# Altium PCB PCB KONACNO.PcbDoc (part 3 of 3)
Units mil, origin at the board's own origin, x right, y up, seen from the top; angles counter-clockwise.
Board outline 9378.94 x 3727.36 mil, 6 copper layers (Top Layer, Signal Layer 1, Signal Layer 2, Signal Layer 3, Signal Layer 4, Bottom Layer), stack 58.8 mil thick; 270 components, 238 nets, 1180 pads, 202 vias.
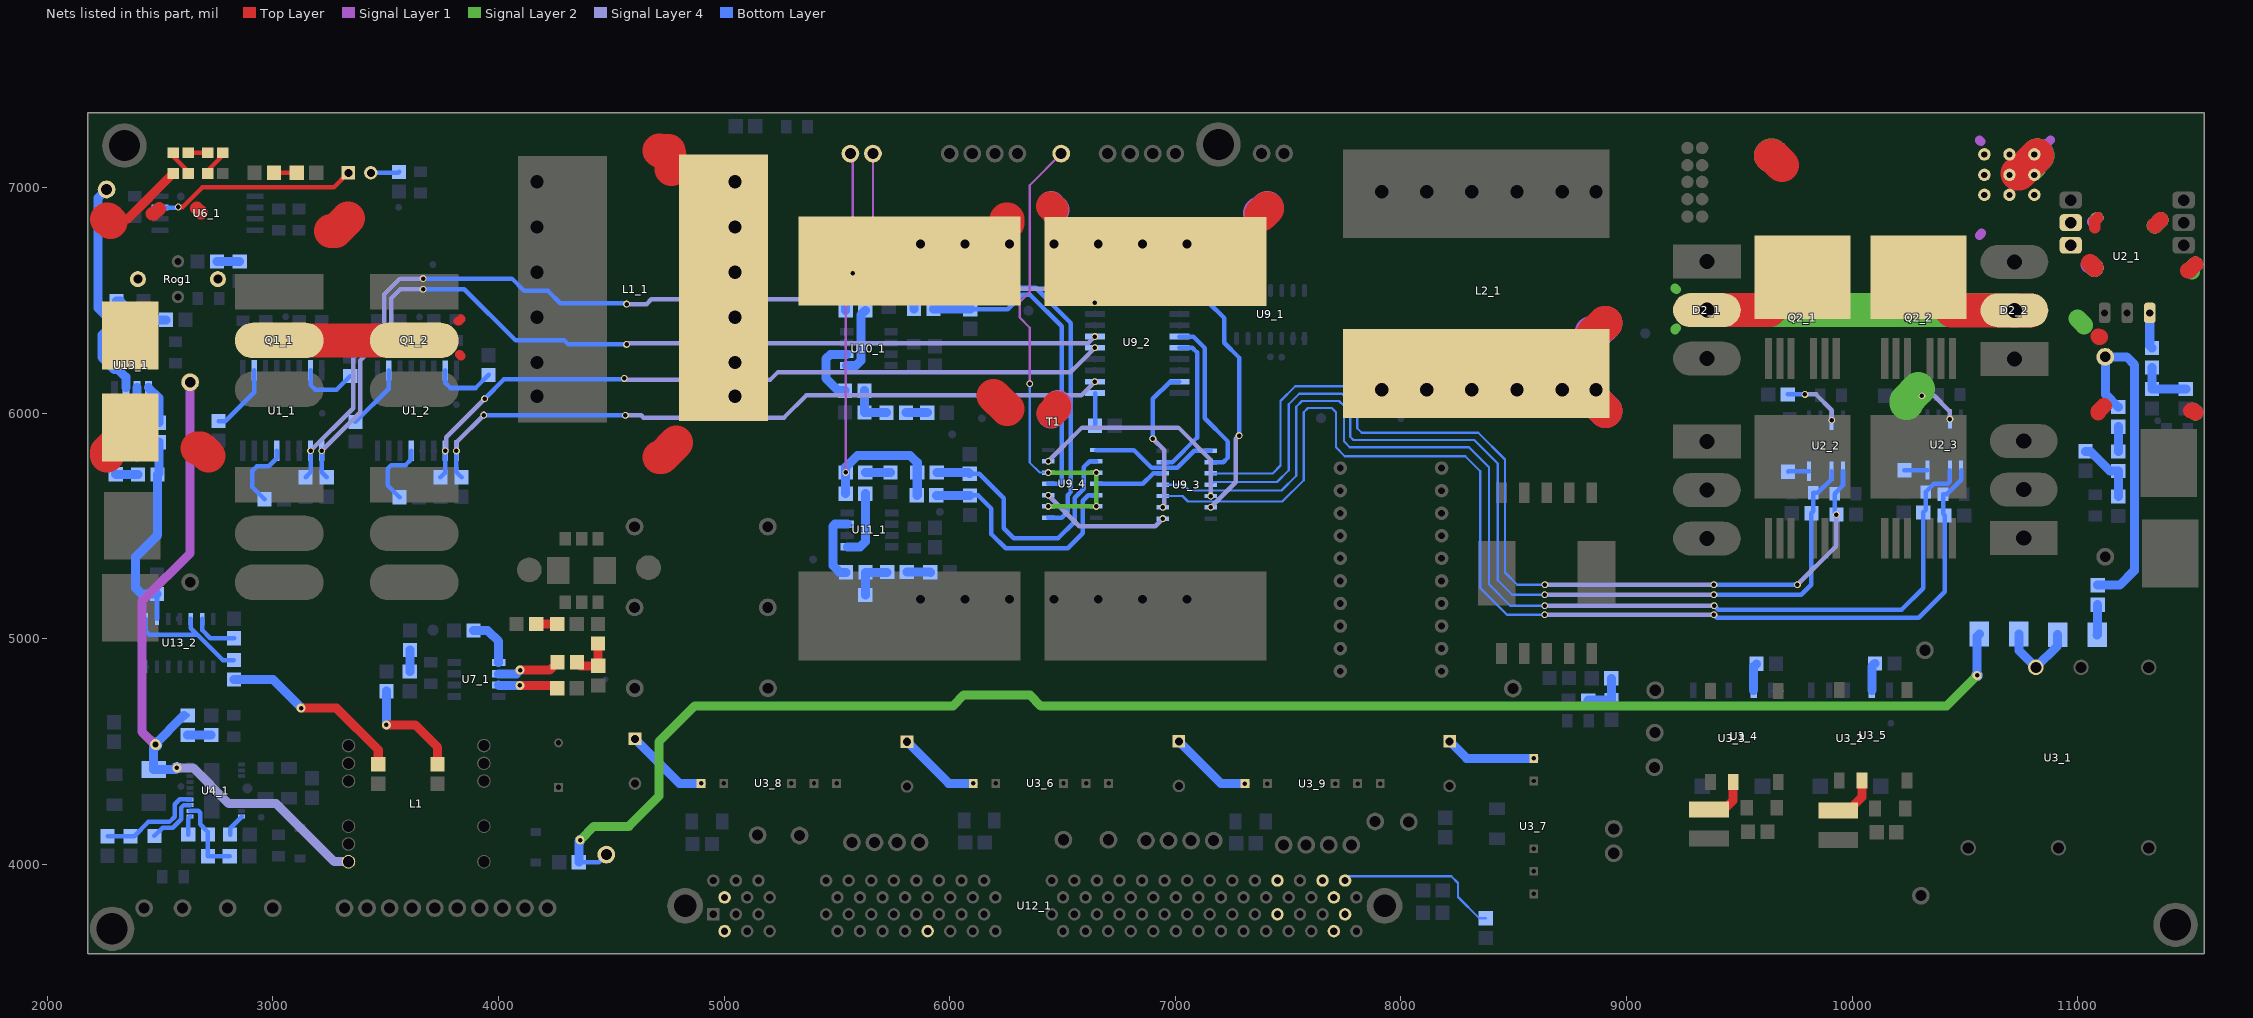
[diagram p7: the nets of this part, all layers, seen from the top]

## Via types
v1: diameter 30, hole 20, Signal Layer 4 to Bottom Layer, 76 vias
v2: diameter 30, hole 20, Top Layer to Bottom Layer, 35 vias
v3: diameter 30, hole 20, Signal Layer 2 to Bottom Layer, 18 vias
v4: diameter 30, hole 20, Signal Layer 1 to Signal Layer 2, 12 vias
v5: diameter 50, hole 28, Top Layer to Bottom Layer, 12 vias
v6: diameter 50, hole 28, Top Layer to Signal Layer 1, 10 vias
v7: diameter 50, hole 28, Top Layer to Signal Layer 2, 9 vias
v8: diameter 40, hole 20, Signal Layer 4 to Bottom Layer, 5 vias
v9: diameter 40, hole 20, Top Layer to Bottom Layer, 5 vias
v10: diameter 30, hole 20, Signal Layer 1 to Bottom Layer, 5 vias
v11: diameter 100, hole 50, Top Layer to Signal Layer 1, 4 vias
v12: diameter 40, hole 20, Signal Layer 2 to Bottom Layer, 3 vias
v13: diameter 40, hole 20, Top Layer to Signal Layer 4, 2 vias
v14: diameter 100, hole 50, Top Layer to Signal Layer 2, 2 vias
v15: diameter 30, hole 20, Signal Layer 3 to Bottom Layer, 1 vias
v16: diameter 120, hole 60, Top Layer to Signal Layer 2, 1 vias
v17: diameter 120, hole 60, Top Layer to Signal Layer 1, 1 vias
v18: diameter 50, hole 28, Signal Layer 1 to Bottom Layer, 1 vias

## Nets (pads, with @x,y where several pads share a name; then routed paths per layer and width w, separated by ;. In a path a pad name is that pad's centre, name@x,y a point inside that pad or via, vN(x,y) a via of type N, cw(c..) or ccw(c..) an arc to the next point about the centre after c; other vN are vias at no path point) (continued)
NetJ25_1: J25.1 pad.6@5570.87,6619.09 R10_7.1 R10_8.2 RP10_1.1 RP10_2.1 | length 1123.2
  Signal Layer 1 w10: J25.1@5560,7150 5570.87,7139.13 v10(5570.87,6619.09)
  Bottom Layer w40: R10_7.1@5539.37,6454.72 R10_8.2@5539.37,6557.09 5539.37,6587.6 v10(5570.87,6619.09) 5807.09,6619.09 5844.49,6581.69 RP10_1.1@5844.49,6555.12 5841.54,6552.17 RP10_2.1@5841.54,6461.61
NetJ26_1: J26.1 pad.6@5539.37,5737.2 R11_7.1 R11_8.2 RP11_1.1 RP11_2.1 | length 2077.5
  Signal Layer 1 w10: v10(5539.37,5737.2) 5539.37,6484.25 5660,6604.88 J26.1@5660,7150
  Bottom Layer w40: R11_7.1@5539.37,5642.72 v10(5539.37,5737.2) 5539.37,5760.83 5590.55,5812.01 5824.8,5812.01 5856.3,5780.51 RP11_1.1@5856.3,5736.22 5856.3,5637.8 RP11_2.1@5854.33,5635.83
NetJ31_1: J31.1 R13_2.2 U13_1.3 | length 1022.2
  Bottom Layer w40: J31.1@2263.78,6991.14 2225.39,6952.76 2225.39,6466.54 2282.48,6409.45 R13_2.2@2307.09,6409.45 2243.11,6345.47 2243.11,6248.03 2298.23,6192.91 2314.96,6192.91 2348.82,6159.06 U13_1.3@2348.82,6113.19
NetL1_1_2: L1_1.2 pad.4@4997.05,6555.12 pad.4@5822.83,6674.21 T1.1 | length 418.9
  Top Layer w150: 4713.58,5804.13 4723.43,5804.13 4788.39,5869.09 ; 4714.57,7163.39 4754.92,7161.42 4767.72,7081.69 ; pad.4@6190.94,6777.56 6255.91,6842.52 6255.91,6857.28 pad.4@6251.97,6857.28 ; 6194.88,6076.77 6253.94,6017.72 6255.91,6017.72
NetL2_1_1: L2_1.1 pad.4@6911.42,6671.26 pad.4@8332.68,6175.2 T1.3 | length 593.6
  Top Layer w130: 6446.85,6917.32 6460.63,6903.54 ; 6449.8,5999.02 6473.43,6022.64 6473.43,6032.48
  Top Layer w150: 7380.91,6879.92 7380.91,6880.91 7407.48,6907.48 ; pad.4@8795.28,6120.08 8906.5,6008.86 pad.4@8906.5,6007.87 ; pad.4@8851.38,6349.41 8901.57,6399.61 8907.48,6399.61
  Signal Layer 1 w130: 6448.82,6919.29 6448.82,6917.32 6465.55,6900.59 ; 6449.8,5997.05 6480.31,6027.56 6480.31,6036.42
  Signal Layer 1 w150: 7375,6885.83 7384.84,6885.83 7407.48,6908.46 ; 8843.5,6356.3 8864.17,6356.3 8907.48,6399.61 ; 8867.13,6048.23 8906.5,6008.86
NetL3_4_1: L3_4.1 U3_4.2 | length 206.5
  Top Layer w40: L3_4.1@9364.17,4244.09 9432.09,4244.09 9472.05,4284.06 U3_4.2@9472.05,4366.14
NetL3_5_1: L3_5.1 U3_5.2 | length 203.8
  Top Layer w40: L3_5.1@9937.99,4238.19 9983.27,4238.19 10042.91,4297.83 U3_5.2@10042.91,4372.05
NetL3_6_1: L3_6.1 U3_6.1 | length 369.5
  Bottom Layer w40: L3_6.1@5811.02,4543.31 5995.08,4359.25 U3_6.1@6104.33,4359.25
NetL3_7_1: L3_7.1 U3_7.1 | length 404.4
  Bottom Layer w40: L3_7.1@8215.55,4545.28 8291.34,4469.49 U3_7.1@8588.58,4469.49
NetL3_8_1: L3_8.1 U3_8.1 | length 374.8
  Bottom Layer w40: L3_8.1@4605.32,4556.1 4802.17,4359.25 U3_8.1@4898.62,4359.25
NetL3_9_1: L3_9.1 U3_9.1 | length 369.8
  Bottom Layer w40: L3_9.1@7015.75,4545.28 7202.76,4358.27 U3_9.1@7308.07,4358.27
NetOC_2: OC.2 R7_10.2 | length 492
  Top Layer w40: v9(3503.94,4618.11) 3630.91,4618.11 3730.31,4518.7 OC.2@3730.31,4443.9
  Bottom Layer w40: v9(3503.94,4618.11) R7_10.2@3503.94,4767.72
NetP6_1_1: P6_1.1 U6_1.7 | length 898.5
  Top Layer w20: v2(2581.69,6913.39) 2600.39,6913.39 2687.01,7000 3269.69,7000 P6_1.1@3334.65,7064.96
  Bottom Layer w20: U6_1.7@2500,6910.83 2579.13,6910.83 v2(2581.69,6913.39)
NetP6_1_2: P6_1.2 R6_7.1 | length 127
  Bottom Layer w20: P6_1.2@3434.65,7064.96 3556.1,7064.96 R6_7.1@3560.04,7068.9
NetQ1_1_D: Q1_1.D Q1_2.D Rog1.Rg2 | length 751.3
  Top Layer w40: 3820.87,6408.46 3825.79,6408.46 3833.66,6416.34 ; 3827.76,6259.84 3833.66,6253.94 3833.66,6252.95
  Top Layer w60: 2663.39,6908.46 2663.39,6907.48 2682.09,6888.78
  Top Layer w150: Q1_1.D@3028.54,6321.85 Q1_2.D@3626.97,6321.85 ; 3256.89,6807.09 3277.56,6807.09 3333.66,6863.19
NetR1_1_1: R1_1.1 U1_1.15 | length 274
  Bottom Layer w20: U1_1.15@3167.6,6189.55 3167.6,6124.72 3187.99,6104.33 3283.46,6104.33 R1_1.1@3343.5,6164.37
NetR1_2_1: R1_2.1 U1_1.10 | length 307.6
  Bottom Layer w20: R1_2.1@2759.84,5964.57 2789.37,5964.57 2917.6,6092.8 U1_1.10@2917.6,6189.55
NetR1_5_2: R1_5.2 U1_1.5 | length 312.7
  Bottom Layer w20: R1_5.2@2963.58,5618.11 2909.45,5672.24 2909.45,5744.09 2930.12,5764.76 2982.28,5764.76 3017.6,5800.08 U1_1.5@3017.6,5833.05
NetR1_6_1: R1_6.1 U1_2.15 | length 280.6
  Bottom Layer w20: U1_2.15@3764.06,6188.76 3764.06,6134.57 3787.4,6111.22 3898.62,6111.22 R1_6.1@3956.69,6169.29
NetR1_7_1: R1_7.1 U1_2.10 | length 289.4
  Bottom Layer w20: R1_7.1@3366.14,5960.63 3514.06,6108.54 U1_2.10@3514.06,6188.76
NetR1_10_2: R1_10.2 U1_2.5 | length 308.4
  Bottom Layer w20: R1_10.2@3562.01,5626.97 3508.86,5680.12 3508.86,5753.94 3524.61,5769.69 3588.58,5769.69 3614.06,5795.16 U1_2.5@3614.06,5832.26
NetR2_1_1: pad.6@9790.35,6082.68 pad.6@9909.06,5968.5 pad.6@9909.45,5968.5 R2_1.1 U2_2.3 | length 268.1
  Signal Layer 4 w20: v1(9790.35,6082.68) 9839.57,6082.68 9909.45,6012.8 v1(9909.45,5968.5)
  Bottom Layer w20: R2_1.1@9714.57,6082.68 v1(9790.35,6082.68)
NetR2_2_1: R2_2.1 U2_2.8 | length 94.3
  Bottom Layer w20: R2_2.1@9715.55,5740.16 9717.52,5742.13 U2_2.8@9809.06,5742.13
NetR2_3_1: pad.6@10309.06,6076.77 pad.6@10432.83,5973.35 R2_3.1 U2_3.3 | length 264.2
  Signal Layer 4 w20: v1(10309.06,6076.77) 10363.19,6076.77 10432.83,6007.13 v1(10432.83,5973.35)
  Bottom Layer w20: R2_3.1@10231.3,6076.77 v1(10309.06,6076.77)
NetR2_4_1: R2_4.1 U2_3.8 | length 101.6
  Bottom Layer w20: R2_4.1@10231.3,5747.05 U2_3.8@10332.83,5746.97 U2_3.8@10332.83,5746.97
NetR2_9_1: R2_9.1 R2_10.2 R2_11.1 | length 244.1
  Bottom Layer w40: R2_9.1@11328.74,6201.77 R2_10.2@11328.74,6107.28 R2_11.1@11478.35,6107.28
NetR2_9_2: R2_9.2 U2_1.7 | length 159.9
  Bottom Layer w40: U2_1.7@11318.5,6444.09 11318.5,6298.62 R2_9.2@11328.74,6288.39
NetR3_8_2: R3_8.2 U3_2.2 | length 124.8
  Bottom Layer w40: U3_2.2@10086.61,4771.65 10086.61,4876.97 R3_8.2@10100.39,4890.75
NetR3_9_1: R3_9.1 U3_3.2 | length 122.4
  Bottom Layer w40: U3_3.2@9562.99,4771.65 9562.99,4875.98 R3_9.1@9575.79,4888.78
NetR4_1_2: R4_1.2 U4_1.13 | length 245.8
  Bottom Layer w20: R4_1.2@2475.39,4125.98 2511.81,4162.4 2557.09,4162.4 2594.49,4199.8 2594.49,4251.97 2605.2,4262.68 U4_1.13@2634.02,4262.68
NetR4_2_2: R4_2.2 R4_3.2 U4_1.14 | length 466.2
  Bottom Layer w20: R4_3.2@2267.72,4125 R4_2.2@2370.08,4125 2385.83,4125 2448.82,4187.99 2542.32,4187.99 2565.94,4211.61 2565.94,4266.73 2587.48,4288.27 U4_1.14@2634.02,4288.27
NetR4_5_1: R4_5.1 U4_1.10 | length 100.9
  Bottom Layer w20: R4_5.1@2811.02,4131.89 2811.02,4160.16 U4_1.10@2862.36,4211.5
NetR4_7_1: R4_7.1 R4_8.2 R4_9.2 U4_1.12 | length 350.4
  Bottom Layer w20: U4_1.12@2634.02,4237.09 2669.41,4237.09 2678.15,4228.35 2678.15,4178.15 2712.6,4143.7 R4_9.2@2712.6,4131.89 R4_8.2@2712.6,4036.42 R4_7.1@2809.05,4036.42
NetR4_9_1: R4_9.1 U4_1.11 | length 82.9
  Bottom Layer w20: R4_9.1@2625.98,4131.89 2625.98,4203.46 U4_1.11@2634.02,4211.5
NetR4_11_2: R4_11.2 R4_12.1 | length 104.3
  Bottom Layer w40: R4_12.1@2623.03,4573.82 R4_11.2@2727.36,4573.82
NetR5_1_1: R5_1.1 R5_2.2 | length 110.2
  Bottom Layer w40: R5_2.2@11179.13,5829.72 R5_1.1@11179.13,5939.96
NetR5_2_1: R5_2.1 R5_3.2 R5_4.1 | length 294.2
  Bottom Layer w40: R5_4.1@11033.46,5830.71 11055.12,5830.71 11142.72,5743.11 R5_2.1@11179.13,5743.11 R5_3.2@11179.13,5630.91
NetR6_1_1: R6_1.1 R6_2.2 | length 119.7
  Top Layer w20: R6_2.2@2558.07,7153.54 2558.07,7138.78 2625.98,7070.87 R6_1.1@2625.98,7062.01
NetR6_2_1: R6_2.1 R6_3.2 | length 86.6
  Top Layer w20: R6_2.1@2625,7153.54 R6_3.2@2711.61,7153.54
NetR6_3_1: R6_3.1 R6_4.2 | length 119.3
  Top Layer w20: R6_4.2@2711.61,7062.01 2711.61,7074.8 2778.54,7141.73 R6_3.1@2778.54,7153.54
NetR6_5_1: R6_5.1 R6_6.2 | length 100.4
  Top Layer w20: R6_5.1@3005.91,7064.96 R6_6.2@3106.3,7064.96
NetR7_1_1: R7_1.1 U7_1.2 | length 281.9
  Top Layer w40: v9(4096.46,4861.22) 4227.36,4861.22 R7_1.1@4261.81,4895.67
  Bottom Layer w40: U7_1.2@4000.98,4844.69 4079.92,4844.69 v9(4096.46,4861.22)
NetR7_1_2: R7_1.2 R7_3.1 R7_4.1 | length 200.8
  Top Layer w40: R7_1.2@4348.43,4895.67 4364.17,4879.92 R7_3.1@4442.91,4879.92 4441.93,4880.91 R7_4.1@4441.93,4979.33
NetR7_2_1: R7_2.1 U7_1.3 | length 265.7
  Top Layer w40: v9(4095.47,4793.31) 4248.03,4793.31 R7_2.1@4260.83,4780.51
  Bottom Layer w40: U7_1.3@4000.98,4794.69 4002.36,4793.31 v9(4095.47,4793.31)
NetR7_5_1: R7_5.1 R7_6.2 | length 93.5
  Top Layer w40: R7_6.2@4167.32,5065.94 R7_5.1@4260.83,5065.94
NetR7_7_2: R7_7.2 U7_1.1 | length 224.7
  Bottom Layer w40: R7_7.2@3889.76,5036.42 3952.76,5036.42 4000.98,4988.19 U7_1.1@4000.98,4894.69
NetR7_8_1: R7_8.1 R7_9.2 | length 95.9
  Bottom Layer w40: R7_9.2@3607.28,4854.33 3608.27,4855.31 R7_8.1@3608.27,4949.8
NetR8_1_1: R8_1.1 R8_2.1 R8_3.1 | length 201.6
  Bottom Layer w40: R8_2.1@8829.72,4726.38 8830.71,4727.36 R8_1.1@8933.07,4727.36 8932.09,4728.35 R8_3.1@8932.09,4824.8
NetR9_1_2: R9_1.2 U9_2.11 | length 144.5
  Bottom Layer w20: R9_1.2@6644.69,5943.9 U9_2.11@6644.69,6088.39
NetR10_2_1: R10_2.1 U10_1.2 | length 293.1
  Bottom Layer w40: R10_2.1@5536.42,6099.41 5506.89,6099.41 5451.77,6154.53 5451.77,6240.16 5472.24,6260.63 U10_1.2@5543.31,6260.63
NetR10_2_2: R10_2.2 R10_10.1 R10_11.2 | length 193.3
  Bottom Layer w40: R10_2.2@5623.03,6099.41 R10_11.2@5623.03,6002.95 5718.5,6002.95 R10_10.1@5719.49,6001.97
NetR10_3_2: R10_3.2 RP10_1.2 U9_4.1 | length 1609.5
  Bottom Layer w20: R10_3.2@6091.54,6555.12 6380.91,6555.12 6537.4,6398.62 6537.4,5650.59 6522.64,5635.83 6522.64,5562.99 6496.06,5536.42 U9_4.1@6437.01,5536.42
  Bottom Layer w40: RP10_1.2@5931.1,6555.12 R10_3.2@6091.54,6555.12
NetR10_4_2: R10_4.2 RP10_2.2 U9_4.4 | length 1405.1
  Bottom Layer w20: R10_4.2@6091.54,6460.63 6257.87,6460.63 6320.87,6523.62 6357.28,6523.62 6496.06,6384.84 6496.06,5693.7 6488.78,5686.42 U9_4.4@6437.01,5686.42
  Bottom Layer w40: RP10_2.2@5928.15,6461.61 6090.55,6461.61 R10_4.2@6091.54,6460.63
NetR10_7_2: R10_7.2 U10_1.1 | length 302.6
  Bottom Layer w40: U10_1.1@5543.31,6210.63 5584.65,6210.63 5606.3,6232.28 5606.3,6435.04 R10_7.2@5625.98,6454.72
NetR10_8_1: R10_8.1 R10_9.2 | length 104.3
  Bottom Layer w40: R10_8.1@5625.98,6557.09 R10_9.2@5730.31,6557.09
NetR10_10_2: R10_10.2 R10_13.2 | length 94.5
  Bottom Layer w40: R10_10.2@5806.1,6001.97 R10_13.2@5900.59,6001.97
NetR11_2_1: R11_2.1 U11_1.3 | length 311.8
  Bottom Layer w40: R11_2.1@5540.35,5294.29 5512.8,5294.29 5482.28,5324.8 5482.28,5498.03 5491.73,5507.48 U11_1.3@5546.26,5507.48
NetR11_2_2: R11_2.2 R11_10.1 R11_11.2 | length 196.3
  Bottom Layer w40: R11_11.2@5625.98,5193.9 5626.97,5194.88 R11_2.2@5626.97,5294.29 R11_10.1@5722.44,5294.29
NetR11_3_2: R11_3.2 RP11_1.2 U9_4.9 | length 1164.9
  Bottom Layer w20: R11_3.2@6088.58,5731.3 6130.91,5731.3 6240.16,5622.05 6240.16,5489.17 6284.45,5444.88 6480.31,5444.88 6554.13,5518.7 6554.13,5625 6594.49,5665.35 6594.49,5760.83 6620.08,5786.42 U9_4.9@6649.61,5786.42
  Bottom Layer w40: RP11_1.2@5942.91,5736.22 6083.66,5736.22 R11_3.2@6088.58,5731.3
NetR11_4_2: R11_4.2 RP11_2.2 U9_4.12 | length 1054.3
  Bottom Layer w20: R11_4.2@6089.57,5634.84 6126.97,5634.84 6185.04,5576.77 6185.04,5463.58 6248.03,5400.59 6522.64,5400.59 6589.57,5467.52 6589.57,5611.22 6614.76,5636.42 U9_4.12@6649.61,5636.42
  Bottom Layer w40: RP11_2.2@5940.94,5635.83 6088.58,5635.83 R11_4.2@6089.57,5634.84
NetR11_7_2: R11_7.2 U11_1.1 | length 301.7
  Bottom Layer w40: U11_1.1@5546.26,5407.48 5603.35,5407.48 5625.98,5430.12 R11_7.2@5625.98,5642.72
NetR11_8_1: R11_8.1 R11_9.2 | length 112.2
  Bottom Layer w40: R11_8.1@5625.98,5737.2 R11_9.2@5738.19,5737.2
NetR11_10_2: R11_10.2 R11_13.2 | length 104.7
  Bottom Layer w40: R11_10.2@5810.04,5295.28 5913.39,5295.28 R11_13.2@5914.37,5294.29
NetR13_1_1: R13_1.1 U13_1.2 | length 153.9
  Bottom Layer w40: U13_1.2@2398.82,6113.19 2398.82,5960.43 R13_1.1@2399.61,5959.65
NetR13_2_1: R13_2.1 R13_4.1 R13_5.2 | length 257
  Bottom Layer w40: R13_2.1@2307.09,6496.06 2324.8,6496.06 2411.42,6409.45 R13_5.2@2427.17,6409.45 2431.1,6413.39 R13_4.1@2526.57,6413.39
NetR13_3_1: R13_3.1 R13_12.2 | length 100.8
  Bottom Layer w40: R13_12.2@2752.95,6671.26 2852.36,6671.26 R13_3.1@2853.35,6672.24
NetR13_6_2: R13_6.2 U13_1.1 | length 175.1
  Bottom Layer w40: U13_1.1@2448.82,6113.19 2496.06,6065.94 R13_6.2@2496.06,5957.68
NetR13_7_1: R13_7.1 R13_8.2 | length 99.2
  Bottom Layer w40: R13_8.2@2304.13,5729.33 2306.1,5727.36 R13_7.1@2402.56,5727.36
NetR13_11_1: R13_11.1 U13_2.1 U13_2.5 | length 579.3
  Bottom Layer w20: U13_2.1@2437.01,5087.6 2437.01,5034.45 2453.74,5017.72 2666.34,5017.72 ; U13_2.5@2637.01,5087.6 2637.01,5047.05 2666.34,5017.72 ; R13_11.1@2827.76,4905.51 2778.54,4905.51 2666.34,5017.72
NetR13_11_2: R13_11.2 SC_ROG.2 | length 834.7
  Top Layer w40: v9(3125.98,4692.91) 3282.48,4692.91 3467.52,4507.87 SC_ROG.2@3467.52,4443.9
  Bottom Layer w40: R13_11.2@2827.76,4818.9 3001.97,4818.9 3125.98,4694.88 v9@3128.94,4694.88
NetU9_1_/Y: U9_1.8 U9_2.1 | length 254.9
  Bottom Layer w20: U9_2.1@7017.72,6539.37 7019.69,6541.34 U9_1.8@7271.85,6541.34
"PWM Q11": pad.6@3217.6,5833.05 pad.6@3666.34,6549.21 pad.6@4567.91,6304.13 pad.6@6643.7,6339.37 R1_3.2 U1_1.1 U9_2.16 | length 4181.3
  Signal Layer 4 w20: v1(3217.6,5833.05) 3387.8,6003.25 3387.8,6233.27 3524.61,6370.08 3524.61,6508.86 3564.96,6549.21 v1(3666.34,6549.21) ; v1(4567.91,6304.13) 4572.83,6309.06 6613.39,6309.06 v1(6643.7,6339.37)
  Bottom Layer w20: v1(3217.6,5833.05) 3217.6,5737.13 R1_3.2@3239.17,5715.55 ; v1(3666.34,6549.21) 3849.41,6549.21 4076.77,6321.85 4292.64,6321.85 4310.36,6304.13 v1(4567.91,6304.13)
"PWM Q12": pad.6@3814.06,5832.26 pad.6@3935.04,5991.14 pad.6@4562.99,5990.16 pad.6@6643.7,6139.37 R1_8.2 U1_2.1 U9_2.12 | length 3114.1
  Signal Layer 4 w20: v1(3814.06,5832.26) 3814.06,5870.16 v1(3935.04,5991.14) ; v1(4562.99,5990.16) 4632.87,5990.16 4642.72,5980.31 5265.75,5980.31 5365.16,6079.72 6584.06,6079.72 v1(6643.7,6139.37)
  Bottom Layer w20: v1(3814.06,5832.26) 3814.06,5738.11 R1_8.2@3836.61,5715.55 ; v1(3935.04,5991.14) 4562.01,5991.14 v1(4562.99,5990.16)
"PWM Q13": pad.6@3167.6,5833.05 pad.6@3666.34,6596.46 pad.6@4567.91,6483.27 pad.6@6643.7,6489.37 R1_4.2 U1_1.2 U9_2.19 | length 4233.1
  Signal Layer 4 w20: v1(3167.6,5833.05) 3356.3,6021.75 3356.3,6246.06 3494.09,6383.86 3494.09,6525.59 3564.96,6596.46 v1(3666.34,6596.46) ; v1(4567.91,6483.27) 4657.48,6483.27 4678.15,6503.94 5430.12,6503.94 5476.38,6550.2 6582.87,6550.2 v1(6643.7,6489.37)
  Bottom Layer w20: R1_4.2@3145.67,5715.55 3167.6,5737.48 v1(3167.6,5833.05) ; v1(3666.34,6596.46) 4060.04,6596.46 4115.16,6541.34 4219.84,6541.34 4273.98,6487.2 4563.98,6487.2 v1(4567.91,6483.27)
"PWM Q14": pad.6@3764.06,5832.26 pad.6@3938.98,6063.98 pad.6@4558.07,6153.54 pad.6@6643.7,6289.37 R1_9.2 U1_2.2 U9_2.15 | length 3231.7
  Signal Layer 4 w20: v1(3764.06,5832.26) 3768.7,5836.91 3768.7,5893.7 v1(3938.98,6063.98) ; v1(4558.07,6153.54) 4562.99,6148.62 5205.71,6148.62 5239.17,6182.09 6536.42,6182.09 v1(6643.7,6289.37)
  Bottom Layer w20: R1_9.2@3743.11,5715.55 3764.06,5736.5 v1(3764.06,5832.26) ; v1(3938.98,6063.98) 4024.61,6149.61 4554.13,6149.61 v1(4558.07,6153.54)
"PWM Q21": C2_5.2 pad.12@8637.8,5239.17 pad.12@9386.81,5239.17 pad.12@9756.89,5239.17 pad.12@9930.12,5550.2 R2_5.2 U2_2.5 U9_3.10 | length 4255.7
  Signal Layer 4 w20: v1(8637.8,5239.17) v1(9386.81,5239.17) ; v1(9756.89,5239.17) 9930.12,5412.4 v1(9930.12,5550.2)
  Bottom Layer w10: U9_3.10@7157.48,5732.48 7431.3,5732.48 7466.54,5767.72 7466.54,6054.13 7531.5,6119.09 7751.97,6119.09 7806.1,6064.96 7806.1,5933.07 7825.79,5913.39 8342.52,5913.39 8461.61,5794.29 8461.61,5293.31 8515.75,5239.17 v1(8637.8,5239.17)
  Bottom Layer w20: v1(9386.81,5239.17) v1(9756.89,5239.17) ; v1(9930.12,5550.2) 9922.24,5558.07 C2_5.2@9922.24,5642.72 9959.06,5679.53 U2_2.5@9959.06,5742.13
"PWM Q21 BUFF": U9_2.5 U9_3.9 | length 745.7
  Bottom Layer w20: U9_2.5@7017.72,6339.37 7078.94,6339.37 7129.92,6288.39 7129.92,5977.36 7233.27,5874.02 7233.27,5803.15 7212.6,5782.48 U9_3.9@7157.48,5782.48
"PWM Q21 SYNC": U9_3.8 U9_4.8 | length 571.3
  Bottom Layer w20: U9_4.8@6649.61,5836.42 6816.14,5836.42 6894.69,5757.87 7009.25,5757.87 7083.86,5832.48 U9_3.8@7157.48,5832.48
"PWM Q22": C2_9.2 pad.12@8636.81,5106.3 pad.12@9386.81,5106.3 R2_7.2 U2_3.5 U9_3.3 | length 5233.2
  Signal Layer 4 w20: v1(8636.81,5106.3) v1(9386.81,5106.3)
  Bottom Layer w10: U9_3.3@6944.88,5632.48 7031.89,5632.48 7056.1,5608.27 7474.41,5608.27 7568.9,5702.76 7568.9,6003.94 7587.6,6022.64 7692.91,6022.64 7711.61,6003.94 7711.61,5848.43 7750.98,5809.06 8284.45,5809.06 8351.38,5742.13 8351.38,5225.39 8470.47,5106.3 v1(8636.81,5106.3)
  Bottom Layer w20: v1(9386.81,5106.3) 9399.61,5093.5 10295.28,5093.5 10409.45,5207.68 R2_7.2@10409.45,5546.26 10402.56,5553.15 C2_9.2@10402.56,5639.76 10418.31,5639.76 10482.83,5704.29 U2_3.5@10482.83,5746.97
"PWM Q22 BUFF": pad.6@6900.59,5886.81 pad.6@6944.88,5582.48 U9_2.9 U9_3.2 | length 653.3
  Signal Layer 4 w20: v1(6900.59,5886.81) 6951.77,5835.63 6951.77,5589.37 v1(6944.88,5582.48)
  Bottom Layer w20: v1(6900.59,5886.81) 6900.59,6062.99 6976.97,6139.37 U9_2.9@7017.72,6139.37
"PWM Q22 SYNC": pad.6@6437.01,5636.42 pad.6@6944.88,5532.48 U9_3.1 U9_4.3 | length 578.6
  Signal Layer 4 w20: v1(6437.01,5636.42) 6574.41,5499.02 6911.42,5499.02 v1(6944.88,5532.48)
"PWM Q23": C2_6.2 pad.12@8636.81,5194.88 pad.12@9386.81,5194.88 R2_6.2 U2_2.6 U9_3.11 | length 4331.4
  Signal Layer 4 w20: v1(8636.81,5194.88) v1(9386.81,5194.88)
  Bottom Layer w10: U9_3.11@7157.48,5682.48 7169.88,5694.88 7450.79,5694.88 7502.95,5747.05 7502.95,6039.37 7549.21,6085.63 7737.2,6085.63 7775.59,6047.24 7775.59,5894.69 7789.37,5880.91 8324.8,5880.91 8429.13,5776.57 8429.13,5258.86 8493.11,5194.88 v1(8636.81,5194.88)
  Bottom Layer w20: v1(9386.81,5194.88) 9774.61,5194.88 9818.9,5239.17 R2_6.2@9818.9,5556.1 9827.76,5564.96 C2_6.2@9827.76,5646.65 9847.44,5646.65 9909.06,5708.27 U2_2.6@9909.06,5742.13
"PWM Q23 BUFF": pad.6@7157.48,5582.48 pad.6@7282.48,5900.59 U9_2.2 U9_3.13 | length 1144.9
  Signal Layer 4 w20: v1(7157.48,5582.48) 7268.34,5693.34 7268.34,5886.45 v1(7282.48,5900.59)
  Bottom Layer w20: U9_2.2@7017.72,6489.37 7148.43,6489.37 7216.54,6421.26 7216.54,6312.01 7282.48,6246.06 v1(7282.48,5900.59)
"PWM Q23 SYNC": pad.6@6437.01,5786.42 pad.6@7157.48,5632.48 U9_3.12 U9_4.6 | length 1001.8
  Signal Layer 4 w20: v1(6437.01,5786.42) 6586.61,5936.02 7013.78,5936.02 7157.48,5792.32 v1(7157.48,5632.48)
"PWM Q24": C2_10.2 pad.12@8636.81,5146.65 pad.12@9387.8,5146.65 R2_8.2 U2_3.6 U9_3.4 | length 5151.4
  Signal Layer 4 w20: v1(8636.81,5146.65) v1(9387.8,5146.65)
  Bottom Layer w10: U9_3.4@6944.88,5682.48 7036.02,5682.48 7061.02,5657.48 7470.47,5657.48 7535.43,5722.44 7535.43,6028.54 7561.02,6054.13 7725.39,6054.13 7747.05,6032.48 7747.05,5875 7773.62,5848.43 8301.18,5848.43 8389.76,5759.84 8389.76,5241.14 8484.25,5146.65 v1(8636.81,5146.65)
  Bottom Layer w20: v1(9387.8,5146.65) 9406.5,5127.95 10218.5,5127.95 10314.96,5224.41 R2_8.2@10314.96,5560.04 10325.79,5570.87 C2_10.2@10325.79,5650.59 10361.22,5686.02 10423.23,5686.02 10432.83,5695.63 U2_3.6@10432.83,5746.97
"PWM Q24 BUFF": U9_2.6 U9_3.6 | length 661.1
  Bottom Layer w20: U9_3.6@6944.88,5782.48 6987.2,5782.48 7096.46,5891.73 7096.46,6268.7 7075.79,6289.37 U9_2.6@7017.72,6289.37
"PWM Q24 SYNC": U9_3.5 U9_4.11 | length 314.4
  Bottom Layer w20: U9_4.11@6649.61,5686.42 6855.91,5686.42 6901.97,5732.48 U9_3.5@6944.88,5732.48
R3_7_11: pad.1@11085.63,5017.72 R3_7.1 | length 133.7
  Bottom Layer w40: pad.1@11085.63,5017.72 11087.6,5019.69 R3_7.1@11087.6,5150.59
"RESET ROG": R13_10.2 U13_2.6 | length 206
  Bottom Layer w20: U13_2.6@2687.01,5087.6 2687.01,5038.39 2723.43,5001.97 R13_10.2@2828.74,5001.97
RX-ISO: U12_1.2
SCI-RX: U12_1.43
SCI-TX: U12_1.93
"SET ROG": R13_6.1 R13_7.2 R13_9.2 U13_2.2 | length 906.1
  Bottom Layer w20: U13_2.2@2487.01,5087.6 2487.01,5197.64 R13_9.2@2487.2,5197.83
  Bottom Layer w40: R13_9.2@2487.2,5197.83 2419.29,5197.83 2391.73,5225.39 2391.73,5361.22 2489.17,5458.66 R13_7.2@2489.17,5727.36 2496.06,5734.25 R13_6.1@2496.06,5871.06
"SYNC EN DSP": J27.1 pad.6@6355.31,6129.92 pad.6@6437.01,5586.42 pad.6@6437.01,5736.42 pad.6@6649.61,5586.42 pad.6@6649.61,5736.42 U9_4.2 U9_4.5 U9_4.10 U9_4.13 | length 2139.6
  Signal Layer 1 w10: v10(6355.31,6129.92) 6355.31,6377.95 6310.04,6423.23 6310.04,6492.13 6354.33,6536.42 6354.33,7010.24 J27.1@6494.09,7150
  Signal Layer 2 w20: v3(6437.01,5586.42) v3(6649.61,5586.42) v3(6649.61,5736.42) v3(6437.01,5736.42)
  Bottom Layer w10: v10(6355.31,6129.92) 6355.31,5780.51 6399.41,5736.42 v3(6437.01,5736.42)
TCK: U12_1.48
TDI: U12_1.97
TDO: U12_1.98
TMS: U12_1.49
TRSTN: R12_2.2 U12_1.99 | length 744.5
  Bottom Layer w10: U12_1.99@7752.51,3928.42 7770.94,3946.85 8223.43,3946.85 8252.95,3917.32 8252.95,3855.31 8347.44,3760.83 R12_2.2@8375.98,3760.83
TX-ISO: U12_1.52
U3VCC+: pad.2@10738.19,5020.67 pad.2@10910.43,5017.72 U3_1.1 | length 363.7
  Bottom Layer w40: pad.2@10738.19,5020.67 10738.19,4948.82 U3_1.1@10813.98,4873.03 10910.43,4969.49 pad.2@10910.43,5017.72
VBAT+: C2_1.1 D2_1.K D2_2.K pad.6@10585.63,6967.52 pad.6@10585.63,7056.1 pad.6@10585.63,7146.65 pad.6@10696.85,6967.52 pad.6@10696.85,7056.1 pad.6@10696.85,7146.65 pad.6@10807.09,6967.52 pad.6@10807.09,7056.1 pad.6@10807.09,7146.65 Q2_1.8 Q2_2.8 R3_7.2 R5_1.2 U2_1.1 U2_1.2 | length 4825.8
  Top Layer w50: 11074.8,6820.87 11074.8,6852.36 11088.58,6866.14
  Top Layer w70: 11090.55,6002.95 11090.55,6006.89 11116.14,6032.48 ; 11090.55,6340.55 11093.5,6337.6 11097.44,6337.6 ; 11341.54,6831.69 11365.16,6855.31 11367.13,6855.31 11367.13,6856.3 ; 11487.2,6631.89 11494.09,6631.89 11521.65,6659.45 ; 11501.97,6010.83 11513.78,6010.83 11521.65,6002.95
  Top Layer w80: 11054.13,6664.37 11072.83,6645.67 11072.83,6643.7 11073.82,6644.69
  Top Layer w150: D2_1.K@9355.91,6456.18 9633.03,6456.18 Q2_1.8@9779.09,6602.24 ; 9639.76,7140.75 9645.67,7140.75 9687.99,7098.43 ; Q2_2.8@10294.09,6602.36 10441.22,6455.24 D2_2.K@10718.9,6455.24 D2_2.K@10791.34,6455.24 ; 10731.3,7062.01 10740.16,7062.01 pad.6@10819.88,7141.73
  Signal Layer 1 w40: 10563.98,6786.42 10563.98,6787.4 10573.82,6797.24 ; 10563.98,7209.65 10563.98,7208.66 10569.88,7202.76 ; 10864.17,7191.93 10864.17,7195.87 10877.95,7209.65
  Signal Layer 1 w50: 11064.96,6847.44 11069.88,6847.44 11088.58,6866.14
  Signal Layer 1 w80: 11052.17,6659.45 11058.07,6659.45 11073.82,6643.7
  Signal Layer 2 w40: 9214.57,6368.11 9214.57,6372.05 9220.47,6377.95 ; 9214.57,6554.13 9214.57,6553.15 9220.47,6547.24
  Signal Layer 2 w50: 11077.76,6863.19 11085.63,6863.19 11088.58,6866.14
  Signal Layer 2 w70: 11338.58,6830.71 11341.54,6830.71 11367.13,6856.3 ; 11505.91,6625.98 11505.91,6643.7 11520.67,6658.46 ; 11508.86,6012.8 11518.7,6002.95 11521.65,6002.95
  Signal Layer 2 w80: 10998.03,6419.29 11027.56,6389.76 11027.56,6387.8 ; 11062.01,6657.48 11072.83,6646.65 11072.83,6643.7 11073.82,6643.7
  Signal Layer 2 w150: D2_1.K@9285.43,6456.18 D2_1.K@9355.91,6456.18 10717.95,6456.18 D2_2.K@10718.9,6455.24 ; 9639.76,7141.73 9645.67,7141.73 ; 10240.16,6043.31 10240.16,6054.13 10292.32,6106.3 ; 10790.35,7104.33 10790.35,7110.24 10820.87,7140.75 pad.6@10820.87,7141.73
  Bottom Layer w40: R3_7.2@11087.6,5237.2 11185.04,5237.2 11250.98,5303.15 11250.98,6213.58 11215.55,6249.02 C2_1.1@11121.06,6249.02 ; C2_1.1@11123.03,6247.05 11123.03,6082.68 R5_1.2@11179.13,6026.57
  other v7: 10585.63,6966.54 10696.85,6966.54 10807.09,6966.54 10585.63,7055.12 10696.85,7055.12 10807.09,7055.12 10585.63,7145.67 10696.85,7145.67 10807.09,7145.67
VDCBUS+: C1_1.1 C4_6.2 L1.1 pad.2@2368.11,5936.02 pad.2@2368.11,6343.5 pad.6@2480.32,4531.5 pad.7@2574.8,4428.15 R4_12.2 R6_1.2 Rog1.Rg1 | length 3643.1
  Top Layer w40: 2268.7,6859.25 2356.3,6859.25 R6_1.2@2559.06,7062.01
  Top Layer w60: 2465.55,6882.87 2474.41,6882.87 2496.06,6904.53
  Top Layer w150: 2264.76,6859.25 2268.7,6859.25 2281.5,6846.46 ; pad.2@2265.75,5811.02 2265.75,5827.76 pad.2@2309.06,5871.06 ; 2665.35,5844.49 2681.1,5844.49 2714.57,5811.02
  Signal Layer 1 w40: pad.6@2479.82,4529.04 2420.28,4588.58 2420.28,5165.35 2633.86,5378.94 C1_1.1@2633.86,6136.81
  Signal Layer 4 w40: v8(2574.8,4428.15) 2646.65,4428.15 2805.12,4269.69 3014.76,4269.69 3272.64,4011.81 L1.1@3329.72,4011.81
  Bottom Layer w20: R4_12.2@2606.3,4660.43 R4_12.2@2623.03,4660.43
  Bottom Layer w40: v8(2574.8,4428.15) 2566.93,4420.28 C4_6.2@2472.44,4420.28 2472.44,4526.57 R4_12.2@2606.3,4660.43
  other v18: 2480.32,4531.5
VFLBK: J45.1 pad.1@10562.99,5020.67 pad.7@4362.2,4107.28 pad.12@10553.15,4837.6 R4_10.2 | length 7098.4
  Signal Layer 2 w40: v12(4362.2,4107.28) 4423.23,4168.31 4577.76,4168.31 4711.61,4302.17 4711.61,4543.31 4871.16,4702.85 6014.86,4702.85 6062.99,4750.98 6355.31,4750.98 6404.53,4701.77 10417.32,4701.77 v12(10553.15,4837.6)
  Bottom Layer w20: R4_10.2@4356.3,4009.84 4444.88,4009.84 J45.1@4478.35,4043.31
  Bottom Layer w40: R4_10.2@4356.3,4009.84 4356.3,4101.38 v12(4362.2,4107.28) ; v12(10553.15,4837.6) 10553.15,5010.83 pad.1@10562.99,5020.67
XCLK-IN: U12_1.16
pads on no net: L1.2 L1.5 L1.7 L1.8 L1.9 L1_2.2 L1_2.4 L1_2.5 L1_2.6 L2_2.1 L2_2.3 L2_2.5 L2_2.6 L2_2.7 L2_2.8 L2_2.9 L2_2.10 U1_1.6 U1_1.7 U1_1.12 U1_1.13 U1_2.6 U1_2.7 U1_2.12 U1_2.13 U2_1.4 U2_2.termal U2_3.termal U3_1.4 U3_1.6 U3_2.4 U3_2.6 U3_2.7 U3_3.4 U3_3.6 U3_3.7 U3_4.8 U3_5.8 U4_1.19 U7_1.5 U7_1.6 U7_1.7 U9_1.9 U9_1.10 U9_1.13 U10_1.5 U10_1.6 U10_1.7 U11_1.5 U11_1.6 U11_1.7 U12_1.3 U12_1.4 U12_1.5 U12_1.53 U12_1.54 U12_1.55 U12_1.66 U12_1.101 U12_1.102 U13_1.5 U13_1.6 U13_1.7 U13_2.8 U13_2.9 U13_2.10 U13_2.11 U13_2.12 U13_2.13

## Polygon pours and split planes (outlines as drawn)
GND_LV on Signal Layer 3 "GNDLV" (solid, remove dead copper, pour order 2): 11558.07,7329.72 5499.02,7329.72 ccw(c5499.02,7235.24) 5404.53,7235.24 5404.53,3659.45 ccw(c5457.68,3659.45) 5457.68,3606.3 11558.07,3606.3
GND_HV on Signal Layer 3 "GNDHV" (solid, remove dead copper, pour order 0): 2183.07,7329.72 5162.8,7329.72 cw(c5162.8,7229.72) 5262.8,7229.72 5262.8,4110.24 5262.8,3706.3 cw(c5162.8,3706.3) 5162.8,3606.3 5062.99,3606.3 2182.09,3606.3

## Keep-outs
Keep-Out Layer:
  lines w10: 2156.5,3580.71 11583.66,3580.71 11583.66,7355.31 2156.5,7355.31 2156.5,3580.71

## Other copper
Top Layer:
  region net GND_HV: 3794.29,5329.72 3872.05,5251.97 3872.05,4848.43 3795.28,4771.65 2270.67,4771.65 2190.94,4851.38 2190.94,5249.02 2271.65,5329.72
  region net GND_HV: 2928.15,5305.12 2895.67,5305.12 2787.4,5413.39 2787.4,5612.2 2713.58,5686.02 2266.73,5686.02 2190.95,5610.24 2190.94,5249.02
  region net GND_LV: 10202.76,5054.13 11108.27,5054.13 11203.74,5149.61 11142.72,5210.63 10326.77,5210.63
  region net GND_LV: 10177.67,5535.43 10893.22,5535.43 10894.2,5536.42 10895.18,5535.43 10895.18,5345.47 11554.13,5345.47 11554.13,5151.57 10178.63,5151.57
  region net GND_LV: 11554.13,5520.7 11554.14,5541.34 11516.73,5578.74 11202.76,5578.74 11202.76,5502.95 11227.96,5477.75
  region net GND_LV: 11107.3,5946.85 11120.08,5946.85 11153.54,5913.39 11153.54,5664.37 11155.51,5664.37 11282.48,5537.4 11523.62,5537.4 11523.62,5500 11434.06,5410.43 11039.37,5410.43
  region net VBAT+: 11001.08,6618.02 11070.87,6548.23 11413.65,6548.23
  region net VBAT+: 11064.96,6890.75 11364.17,6890.75 11402.56,6852.36 11402.56,6706.69 11415.35,6693.9 11519.68,6693.9 11556.1,6657.48 11556.1,5996.06 11528.54,5968.5 11090.55,5968.5 11056.1,6002.95 11056.1,6344.49 11086.61,6375 11336.61,6375 11357.28,6395.67 11357.28,6488.19 11340.55,6504.92 11114.17,6504.92 11063.98,6555.12 11063.98,6807.09
  region net VBAT+: 10530.51,7215.55 10811.02,7215.55 10894.68,7131.89 10894.68,6908.46 10912.4,6890.75 11089.57,6890.75 11113.19,6867.13 11113.19,6642.72 11074.8,6604.33 11015.75,6604.33 10854.33,6765.75 10448.82,6765.75
  region net VDCBUS+: 2190.94,5809.06 2262.8,5737.2 2710.63,5737.2 2789.37,5815.94 2789.37,6135.83 2525.59,6399.61 2525.59,6902.56 2494.1,6934.05 2254.92,6934.06 2190.94,6870.08
  region net NetQ1_1_D: 2780.51,6614.17 2803.15,6614.17 2836.61,6647.64 2816.93,6667.32 2796.26,6667.32
  region net NetQ1_1_D: 2880.91,6436.02 2831.69,6436.02 2812.01,6455.71 2812.01,6937.99 2664.37,6937.99 2633.86,6907.48 2633.86,6359.25 2759.84,6233.27 2873.03,6233.27
  region net NetQ1_1_D: 3229.33,6436.02 3245.08,6451.77 3245.08,6624.02 3227.36,6641.73 2765.75,6641.73 2765.75,6937.99 3331.69,6937.99 3408.46,6861.22 3408.46,6451.77 3424.21,6436.02 3833.66,6436.02 3853.35,6416.34 3853.35,6251.97 3834.65,6233.27 2873.03,6233.27 2814.96,6291.34 2814.96,6370.08 2880.91,6436.02
  region net DRAINQ14: 4159.45,5540.35 4159.45,5791.34 4065.94,5884.84 4065.94,6123.03 3982.28,6206.69 3447.83,6206.69 3398.62,6157.48 3398.62,5842.52 3444.88,5796.26 3831.69,5796.26 3855.32,5772.64 3855.32,5600.39 3812.01,5557.09
  region net DRAINQ14: 4323.82,5226.38 4348.43,5250.98 4348.43,5356.3 4322.83,5381.89 4194.88,5381.89 4159.45,5417.32 4159.45,5540.35 4124.02,5575.79 3423.23,5575.79 3397.64,5550.2 3397.64,5381.89 3423.23,5356.3 3888.78,5356.3 3916.34,5328.74 3916.34,5254.92 3944.88,5226.38
  region net NetC1_2_1: 4885.83,5633.86 4961.61,5558.07 4961.61,4763.78 4880.91,4683.07 4599.41,4683.07 4523.62,4758.86 4523.62,5219.49 4516.73,5226.38 4400.59,5226.38 4385.83,5241.14 4385.83,5361.22 4403.54,5378.94 4523.62,5378.94 4537.4,5392.72 4537.4,5557.09 4614.17,5633.86
  region net NetC1_2_2: 6261.81,5822.83 6333.66,5750.98 6333.66,4761.81 6255.91,4684.05 5131.89,4684.05 5043.31,4772.64 5043.31,5565.94 5044.29,5565.94 5111.22,5632.87 5243.11,5632.87 5433.07,5822.83
  region net NetL1_1_2: 6106.19,6932.09 6248.03,6932.09 6330.71,6849.41 6330.71,6017.72 6255.91,5942.91 6048.93,5942.91
  region net NetL1_1_2: 6201.77,6932.09 5474.41,6932.09 5168.31,7238.19 4721.46,7238.19 4638.78,7155.51 4638.78,5800.2 4708.66,5730.31 4850.39,5730.31 4948.82,5730.31 5168.31,5730.31 5380.91,5942.91 6201.77,5942.91
  region net GND_LV: 10898.68,5802.11 11009.84,5690.94 11045.28,5690.94 11045.28,5787.4 11026.57,5806.1
  region net GND_LV: 9659.45,5534.45 9659.45,5335.63 9642.72,5318.9 9596.46,5318.9 9581.69,5333.66 9581.69,5480.31 9548.23,5513.78 9126.97,5513.78 9126.97,5054.13 9219.49,4961.61 10012.8,4961.61 10012.8,5534.45
  region net VBAT+: 10534.45,6381.89 10530.51,6385.83 10530.51,7215.55 9640.75,7215.55 9565.94,7140.75 9565.94,6381.89
  region net DRAINQ23: 9663.39,6335.63 9663.39,6136.81 9646.65,6120.08 9600.39,6120.08 9585.63,6134.84 9585.63,6281.5 9552.17,6314.96 9125.98,6314.96 9125.98,6178.15 9313.98,5990.16 9566.93,5990.16 9566.93,5583.66 9945.87,5583.66 10016.73,5654.53 10016.73,6335.63
  region net DRAINQ24: 10177.17,6138.78 10062.01,6023.62 10062.01,5643.7 10123.03,5582.68 10484.25,5582.68 10533.46,5631.89 10532.48,5632.87 10532.48,5959.65 10580.71,6007.87 10963.58,6007.87 11043.31,6087.6 11043.31,6316.93 11025.59,6334.65 10177.17,6334.65
  region net GND_LV: 9662.4,5536.42 9663.39,5537.4 10039.37,5537.4 10102.36,5474.41 10102.36,5333.66 10125,5311.02 10157.48,5311.02 10187.5,5341.04 10199.8,5328.74 10199.8,4961.61 9743.11,4961.61 9662.4,5042.32
  region net GND_LV: 10977.36,5946.85 11086.61,5946.85 11107.3,5946.85 11107.3,5530.5 11554.13,5530.5 11554.13,5345.47 10877.95,5345.47 10871.06,5352.36 10872.05,5353.35 10872.05,5517.72 10889.76,5517.72 10977.36,5605.31
  region net DRAINQ24: 7680.12,7230.31 9463.58,7230.31 9539.37,7154.53 9539.37,6872.05 9461.61,6794.29 9081.69,6794.29 8826.77,6539.37 7680.12,6539.37 7604.33,6615.16 7604.33,7154.53 7638.78,7188.98
  region net NetL2_1_1: 6457.68,5933.07 6384.84,6005.91 6384.84,6912.4 6454.72,6982.28 7416.34,6982.28 7482.28,6916.34 7482.28,6537.4 7545.28,6474.41 8900.59,6474.41 8981.3,6393.7 8981.3,6015.75 8898.62,5933.07
  region net VBAT+: 9485.24,6525.59 9585.63,6625.98 9635.83,6625.98 9635.83,6537.4 9617.13,6518.7
  region net NetC2_2_2: 8066.93,5815.94 8321.85,5815.94 8398.62,5739.17 8398.62,5566.93 8462.6,5502.95 8535.43,5502.95 8601.38,5437.01 8601.38,5159.45 8528.54,5086.61 8452.76,5086.61 8397.64,5031.5 8397.64,4817.91 8325.79,4746.06 8071.85,4746.06 7997.05,4820.87 7997.05,5746.06
  region net NetC2_2_1: 7850.16,5816.93 6479.33,5816.93 6396.65,5734.25 6396.65,4823.82 6474.41,4746.06 7846.46,4746.06 7851.42,4751.02
  region net NetC2_2_1: 7850.16,5816.93 7929.13,5737.96 7929.13,4828.74 7851.42,4751.02
  region net GND_LV: 11554.14,4994.1 11518.7,4958.66 11149.61,4958.66 10934.06,5174.21 11051.18,5291.34 11554.13,5291.34
  region net GND_LV: 10199.8,4961.61 10438.98,5200.79 10438.98,5225.39 10126.97,5225.39 10103.35,5201.77 10103.35,4965.55
Signal Layer 1:
  region net KLEMA_NN+: 10915.35,6912.4 10924.21,6903.54 11108.27,6903.54 11129.92,6881.89 11129.92,6527.56 11152.56,6504.92 11340.55,6504.92 11357.28,6488.19 11357.28,6394.69 11337.6,6375 11221.46,6375 11181.1,6334.65 11181.1,5681.1 11180.12,5680.12 11261.81,5598.43 11524.61,5598.42 11557.09,5630.91 11557.09,6882.87 11544.29,6895.67 11426.18,6895.67 11403.54,6918.31 11403.54,7191.93 11366.14,7229.33 10939.96,7229.33 10915.35,7204.73
  region net VBAT+: 10876.97,7229.33 10897.64,7208.66 10897.64,6900.59 10907.48,6890.75 11084.65,6890.75 11113.19,6862.2 11113.19,6650.59 11066.93,6604.33 11014.76,6604.33 10852.36,6766.73 10562.99,6766.73 10544.29,6785.43 10544.29,7208.66 10564.96,7229.33
  region net DRAINQ14: 4159.45,5540.35 4159.45,5791.34 4065.94,5884.84 4065.94,6123.03 3982.28,6206.69 3447.83,6206.69 3398.62,6157.48 3398.62,5842.52 3444.88,5796.26 3831.69,5796.26 3855.32,5772.64 3855.32,5600.39 3812.01,5557.09
  region net DRAINQ14: 4323.82,5226.38 4348.43,5250.98 4348.43,5356.3 4322.83,5381.89 4194.88,5381.89 4159.45,5417.32 4159.45,5540.35 4124.02,5575.79 3423.23,5575.79 3397.64,5550.2 3397.64,5381.89 3423.23,5356.3 3888.78,5356.3 3916.34,5328.74 3916.34,5254.92 3944.88,5226.38
  region net NetC1_2_1: 4884.84,5633.86 4961.61,5557.09 4961.61,4771.65 4872.05,4682.09 4595.47,4682.09 4523.62,4753.94 4523.62,5219.49 4516.73,5226.38 4400.59,5226.38 4385.83,5241.14 4385.83,5361.22 4403.54,5378.94 4523.62,5378.94 4537.4,5392.72 4537.4,5557.09 4614.17,5633.86
  region net NetC2_2_1: 7834.65,5816.93 7929.13,5722.44 7929.13,4819.88 7855.31,4746.06 6474.41,4746.06 6396.65,4823.82 6396.65,5733.27 6480.31,5816.93
  region net DRAINQ24: 10177.17,6139.76 10062.01,6024.61 10062.01,5644.69 10123.03,5583.66 10484.25,5583.66 10533.46,5632.87 10532.48,5633.86 10532.48,5960.63 10580.71,6008.86 10963.58,6008.86 11043.31,6088.58 11043.31,6317.91 11025.59,6335.63 10177.17,6335.63
  region net DRAINQ24: 10177.17,6139.76 10177.17,6335.63 10176.18,6335.63 10127.95,6383.86 9640.75,6383.86 9562.99,6461.61 9562.99,6732.28 9500.98,6794.29 9081.69,6794.29 8826.77,6539.37 7679.13,6539.37 7605.31,6613.19 7605.32,7147.64 7687.99,7230.31 10456.69,7230.32 10532.48,7154.53 10532.48,6170.28 10500.98,6138.78 10489.17,6138.78
  region net DRAINQ24: 10517.72,6776.57 10517.72,6731.3 10570.87,6731.3 10516.03,6786.14
  region net DRAINQ24: 10565.94,6597.44 10492.13,6597.44 10491.14,6596.46 10491.14,6529.53 10505.91,6529.53 10574.11,6597.73
  region net DRAINQ24: 10525.59,6363.19 10525.59,6317.91 10578.74,6317.91 10578.74,6328.74 10527.56,6379.92 10522.64,6379.92
  region net NetL2_1_1: 6453.74,5933.07 6384.84,6001.97 6384.84,6910.93 6456.2,6982.28 7422.74,6982.28 7481.3,6923.72 7481.3,6544.78 7551.67,6474.41 8906.99,6474.41 8981.3,6400.1 8981.3,6014.27 8900.1,5933.07
  region net DRAINQ23: 9663.39,6335.63 9663.39,6136.81 9646.65,6120.08 9600.39,6120.08 9585.63,6134.84 9585.63,6281.5 9552.16,6314.96 9127.95,6314.96 9127.95,6176.18 9313.98,5990.16 9566.93,5990.16 9566.93,5583.66 9945.87,5583.66 10016.73,5654.53 10016.73,6335.63
  region net DRAINQ23: 10016.73,5654.53 10016.73,5036.42 9940.94,4960.63 8941.93,4960.63 8815.94,5086.61 8757.87,5086.61 8679.13,5165.35 8679.13,5416.34 8761.81,5499.02 8799.21,5499.02 9032.48,5732.28 9177.17,5732.28 9177.17,5400.59 9273.62,5304.13 9593.5,5304.13 9660.43,5371.06 9660.43,5649.61
  region net DRAINQ23: 9177.17,5732.28 9376.97,5732.28 9397.64,5711.61 9385.83,5699.8 9131.89,5699.8
  region net NetC2_2_2: 8066.93,5815.94 8321.85,5815.94 8398.62,5739.17 8398.62,5566.93 8462.6,5502.95 8535.43,5502.95 8601.38,5437.01 8601.38,5159.45 8528.54,5086.61 8452.76,5086.61 8397.64,5031.5 8397.64,4817.91 8325.79,4746.06 8071.85,4746.06 7997.05,4820.87 7997.05,5746.06
Signal Layer 2:
  region net GND_LV: 10200.79,5054.13 11121.06,5054.13 11163.39,5096.46 11057.09,5202.76 10328.74,5202.76
  region net GND_LV: 11554.13,5516.24 11554.13,5538.39 11513.78,5578.74 11172.24,5578.74 11187.01,5563.98 11187.01,5453.98
  region net GND_LV: 11108.28,5947.83 11119.09,5947.83 11153.54,5913.39 11153.54,5665.35 11288.39,5530.51 11523.62,5530.51 11523.62,5513.78 11448.82,5438.98 11047.24,5438.98
  region net VBAT+: 11081.69,6890.75 11370.08,6890.75 11401.57,6859.25 11401.57,6707.68 11415.35,6693.9 11519.68,6693.9 11556.1,6657.48 11556.1,6000.98 11523.62,5968.5 11163.39,5968.5 11027.56,6104.33 11088.58,6165.35 11088.58,6375.98 11337.6,6375.98 11357.28,6395.67 11357.28,6488.19 11340.55,6504.92 11083.66,6504.92
  region net VBAT+: 11052.99,6411.58 11088.58,6375.98 11209.65,6375.98 11248.03,6337.6 11248.03,6143.7 10917.32,6143.7 10911.42,6137.8 10866.14,6137.8 10866.14,6145.67 10886.81,6166.34 10885.83,6167.32 10885.83,6335.63 10857.28,6364.17 10799.21,6364.17
  region net VBAT+: 10098.43,6367.13 10165.35,6300.2 10165.35,6034.45 10231.3,5968.5 11363.19,5968.5 11393.7,5999.02 11393.7,6066.93 11303.15,6157.48 10449.8,6157.48 10414.37,6192.91 10414.37,6307.09 10477.53,6370.24
  region net VBAT+: 10572.83,6558.07 10849.41,6558.07 10885.83,6594.49 10885.83,6740.16 11020.67,6740.16 11113.19,6647.64 11113.19,6532.48 11066.93,6486.22 11066.93,6387.8 11027.56,6348.43 9213.58,6348.42 9194.88,6367.13 9194.88,6553.15 9215.06,6573.33 9532.97,6573.33
  region net VBAT+: 10547.24,7215.55 10812.01,7215.55 10895.67,7131.89 10895.67,6902.56 10907.48,6890.75 11089.57,6890.75 11113.19,6867.13 11113.19,6647.64 11069.88,6604.33 11015.75,6604.33 10854.33,6765.75 10517.72,6765.75
  region net DRAINQ13: 2906.5,5416.34 2985.24,5337.6 3378.94,5337.6 3453.74,5412.4 3453.74,5632.87 3553.15,5732.28 4399.61,5732.28 4477.36,5810.04 4477.36,7153.54 4396.65,7234.25 3935.04,7234.25 3847.44,7146.65 3847.44,6512.8 3787.4,6452.76 2967.52,6452.76 2906.5,6391.73
  region net VBAT+: 10547.24,6381.89 10547.24,7215.55 9639.76,7215.55 9564.96,7140.75 9564.96,6381.89
  region net VBAT+: 9490.16,6530.51 9575.79,6616.14 9633.86,6616.14 9633.86,6538.39 9652.56,6519.69
  region net VBAT+: 10611.23,6520.66 10508.86,6623.03 10405.51,6623.03 10405.51,6541.34 10395.67,6531.5
  region net VBAT+: 10605.32,6827.76 10489.17,6711.61 10489.17,6813.98 10460.63,6842.52
  region net DRAINQ23: 8761.81,5499.02 8799.21,5499.02 9032.48,5732.28 9476.38,5732.28 9488.19,5720.47 9488.19,5595.47 9477.36,5584.65 9246.06,5584.65 9246.06,5583.66 9173.23,5510.83 9173.23,5171.26 9088.58,5086.61 8767.72,5086.61 8679.13,5175.2 8679.13,5416.34
  region net GND_LV: 10977.36,5947.83 11086.61,5947.83 11108.28,5947.83 11108.28,5532.47 11523.62,5532.47 11523.62,5346.46 10877.95,5346.46 10871.06,5353.35 10872.05,5354.33 10872.05,5518.7 10880.91,5518.7 10977.36,5615.16
  region net GND_LV: 11554.13,5155.51 10171.26,5155.51 10171.26,5939.96 10182.09,5950.79 10589.57,5950.79 10602.36,5937.99 10602.36,5561.02 10625,5538.39 11554.13,5538.39
  region net GND_LV: 10986.22,5715.55 10900.59,5801.18 10900.59,5837.6 10999.02,5837.6 11016.73,5819.88
  region net GND_LV: 10585.83,5764.96 10659.45,5838.58 10567.42,5838.58
  region net GND_LV: 9209.65,5949.8 10124.02,5949.8 10195.87,5877.95 10195.87,5579.72 10132.87,5516.73 9614.17,5516.73 9530.51,5600.39 9530.51,5714.57 9445.87,5799.21 9206.69,5799.21
  region net GND_LV: 10199.66,4961.61 9275.59,4961.61 9202.76,5034.45 9202.76,5488.19 9250,5535.43 9251.97,5533.46 9500,5533.46 9500,5501.97 9644.69,5357.28 10199.66,5357.28
  region net GND_LV: 9603.35,5486.19 9603.35,5395.76 9588.58,5380.99 9548.23,5421.35 9548.23,5432.18
  region net GND_LV: 9587.6,5480.31 10212.6,5480.31 10217.52,5485.24 10206.69,5496.06 10206.69,5526.57 9631.89,5526.57 9628.94,5523.62
  region net GND_LV: 9582.68,5412.4 10188.98,5412.4 10234.25,5367.13 10199.8,5332.68 9600.39,5332.68
  region net GND_LV: 9572.34,5429.63 9599.9,5429.63 9628.94,5400.59 9625,5396.65 9620.08,5396.65
  region net GND_LV: 9624.95,5488.24 9674.7,5438.48 9717.52,5481.3 9717.52,5493.11
  region net GND_LV: 9670.28,5493.11 10111.22,5493.11 10122.05,5482.28 10122.05,5360.24 10084.65,5397.64 9671.26,5397.64 9645.67,5423.23 9645.67,5492.13 9666.34,5512.8
  region net GND_LV: 9593.54,5373.06 9673.23,5452.76 9695.87,5452.76 9729.33,5419.29
  region net GND_LV: 10087.06,5428.6 10145.67,5487.2 10145.67,5509.84 10093.5,5509.84 10083.66,5500
  region net GND_LV: 10153.54,5503.67 10153.54,5480.31 10188.98,5444.88 10217.52,5473.43 10217.52,5485.24
  region net GND_LV: 10151.57,5389.93 10151.58,5411.42 10187.99,5447.83 10213.58,5422.24 10213.58,5409.45
  region net GND_LV: 10160.17,5390.03 10105.31,5444.88 10074.8,5414.37 10074.8,5385.15
  region net GND_LV: 11149.61,4958.66 10948.82,5159.45 10948.82,5173.23 11536.42,5173.23 11554.13,5155.51 11554.13,4999.02 11513.78,4958.66
  region net GND_LV: 10199.66,4961.61 10415.35,5177.31 10415.35,5198.82 10144.68,5198.82 10111.22,5165.35 10111.22,4963.58

## Silkscreen, mask and mechanical layers (free items; w line width, h text height)
Bottom Overlay:
  lines w5: 10507.87,4952.76 10507.87,5092.52 10797.24,5092.52 10797.24,4952.76 10507.87,4952.76 ; 10855.31,4949.8 11144.68,4949.8 11144.68,5089.57 10855.31,5089.57 10855.31,4949.8
  text "D3_1" at 10516.73,5115.16 h30
  text "D3_2" at 10862.2,5110.24 h30

## Text inside footprints (layer, text, board x,y; h text height)
D2_1: Top Overlay "o" at 9421.26,6785.43 h73.82
D2_2: Top Overlay "o" at 10653.54,6125.98 h73.82 r180
D2_3: Top Overlay "o" at 9421.26,5988.19 h73.82
D2_4: Top Overlay "o" at 10694.88,5331.69 h73.82 r180
U2_2: Bottom Overlay "o" at 9789.06,5988.5 h20 r90
U2_3: Bottom Overlay "o" at 10312.83,5993.35 h20 r90
U12_1: Top Overlay "100" at 7728.69,3992.4 h59.06; Top Overlay "73" at 6403.3,3992.4 h59.06; Top Overlay "71" at 6113.14,3992.4 h59.06; Top Overlay "57" at 5403.3,3992.4 h59.06; Top Overlay "55" at 5103.3,3992.4 h59.06; Top Overlay "51" at 4913.14,3992.4 h59.06